# Altium PCB Transformer_25_3_caseAB.PcbDoc
Units mm, origin at the board's own origin, x right, y up, seen from the top; angles counter-clockwise.
Board outline 118 x 78 mm, 6 copper layers (Top Layer, Layer 2, Layer 3, Layer 4, Layer 5, Bottom Layer), stack 0.816 mm thick; 4 components, 12 nets, 28 pads, 20 vias.
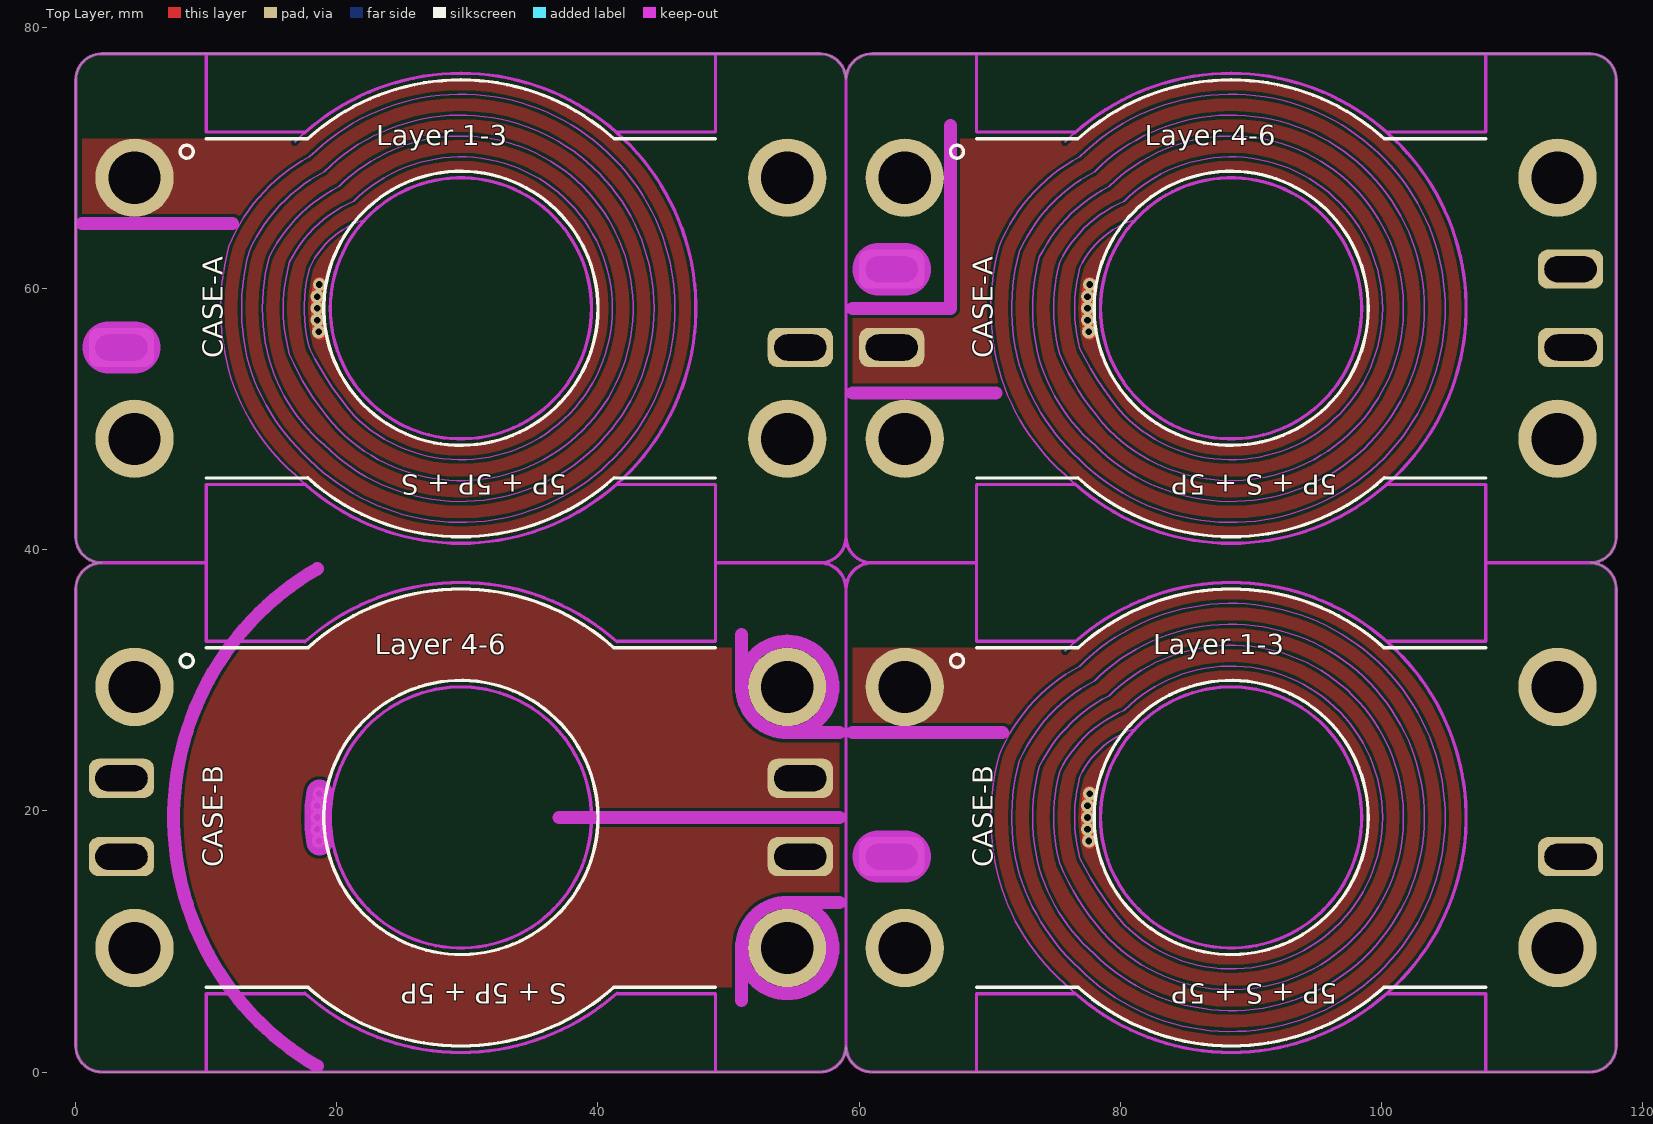
[diagram p0: Top Layer view]
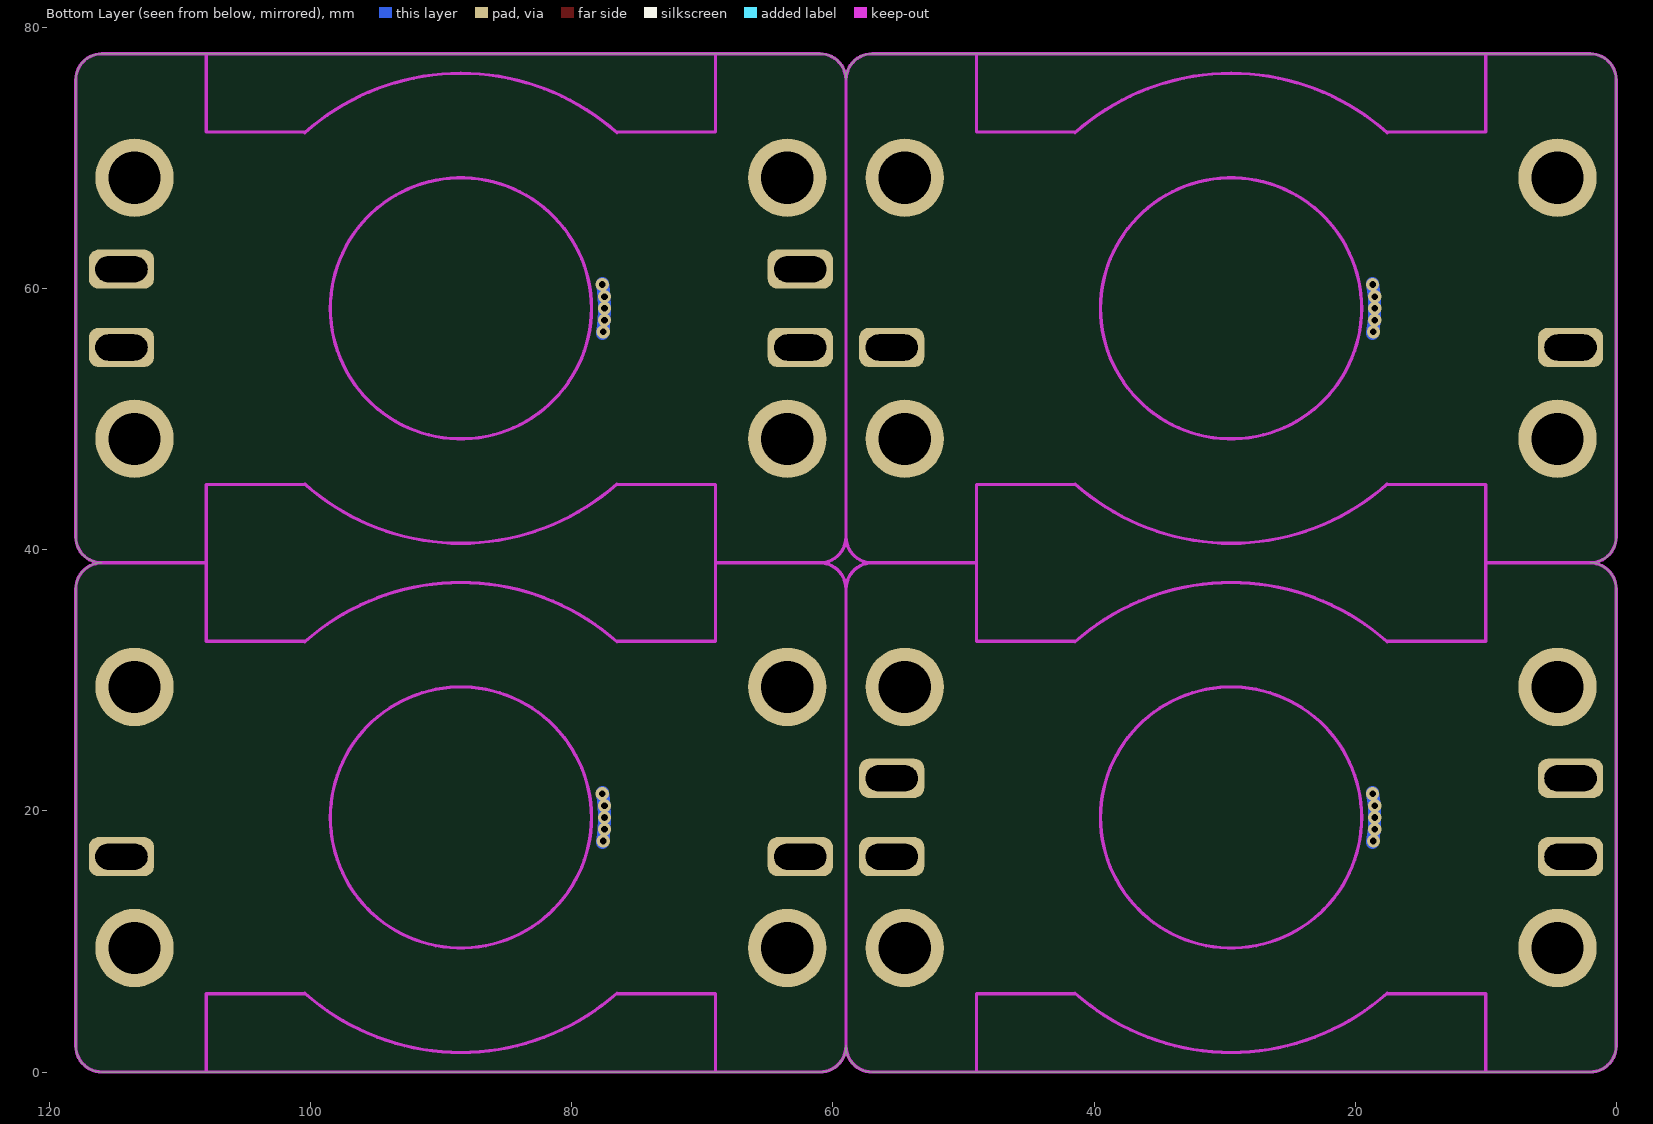
[diagram p1: Bottom Layer view, seen from below]
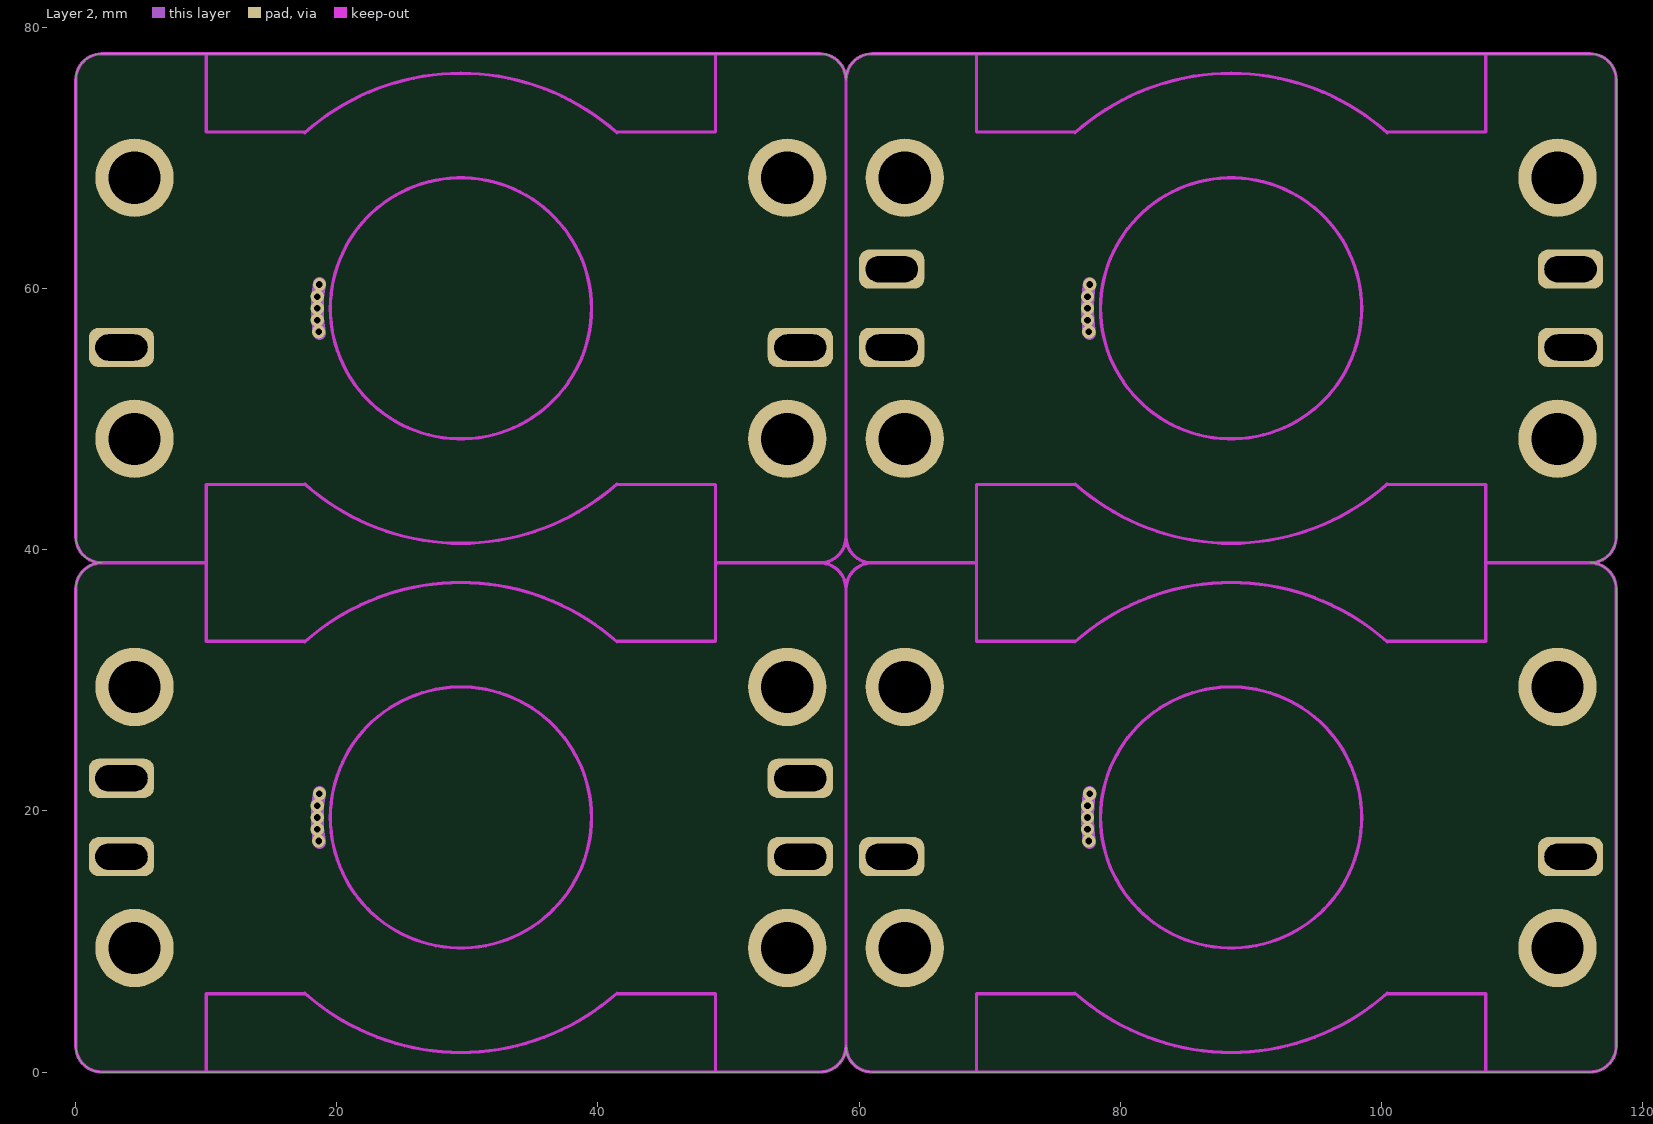
[diagram p2: Layer 2]
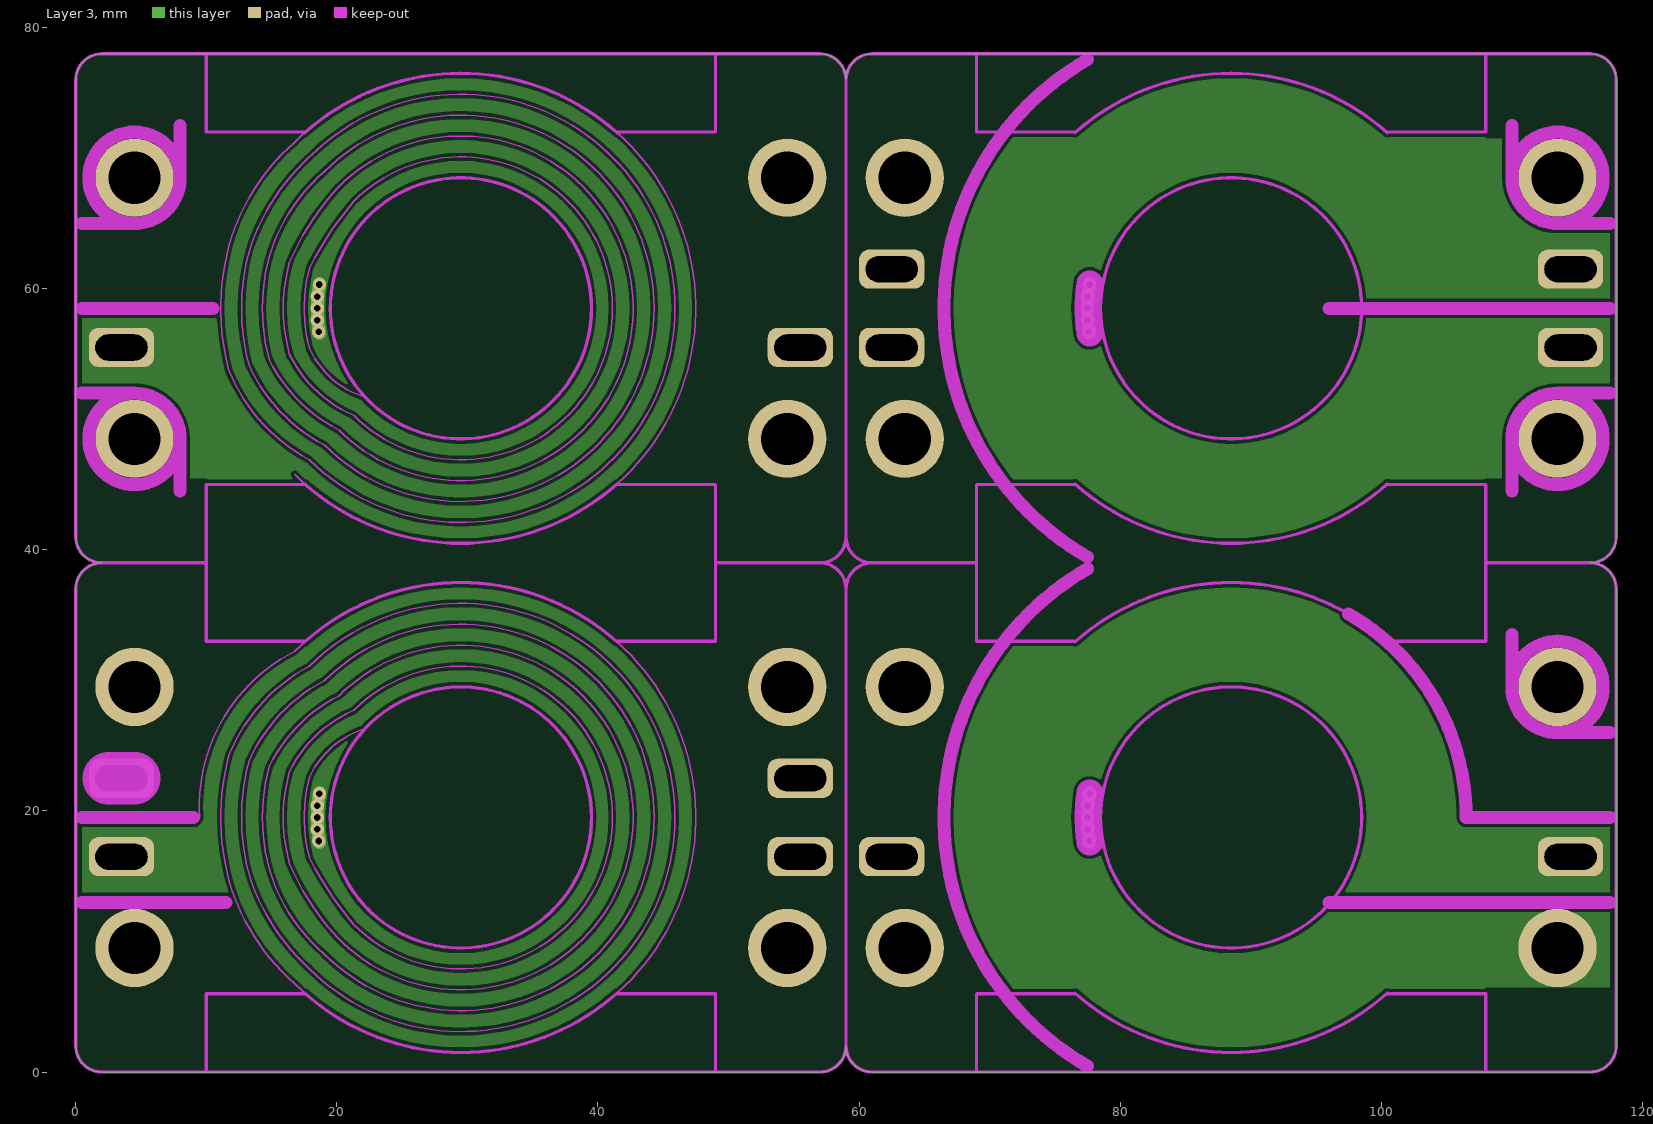
[diagram p3: Layer 3]
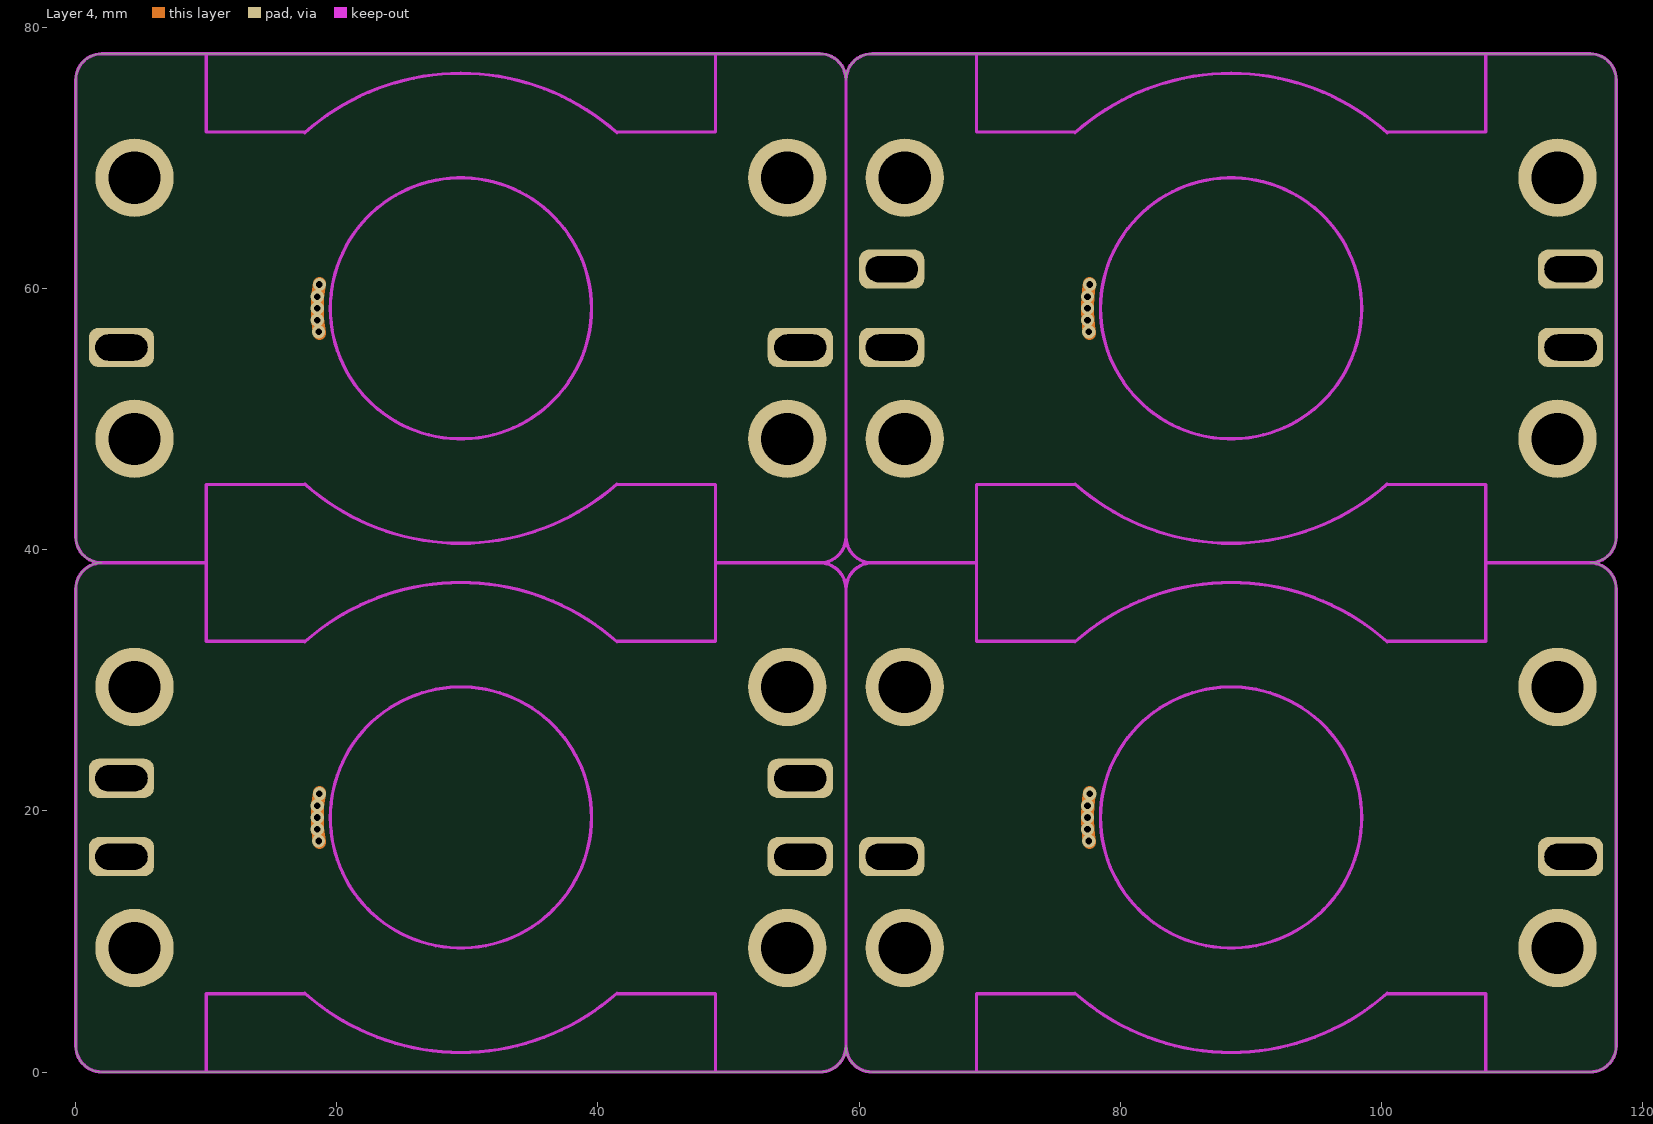
[diagram p4: Layer 4]
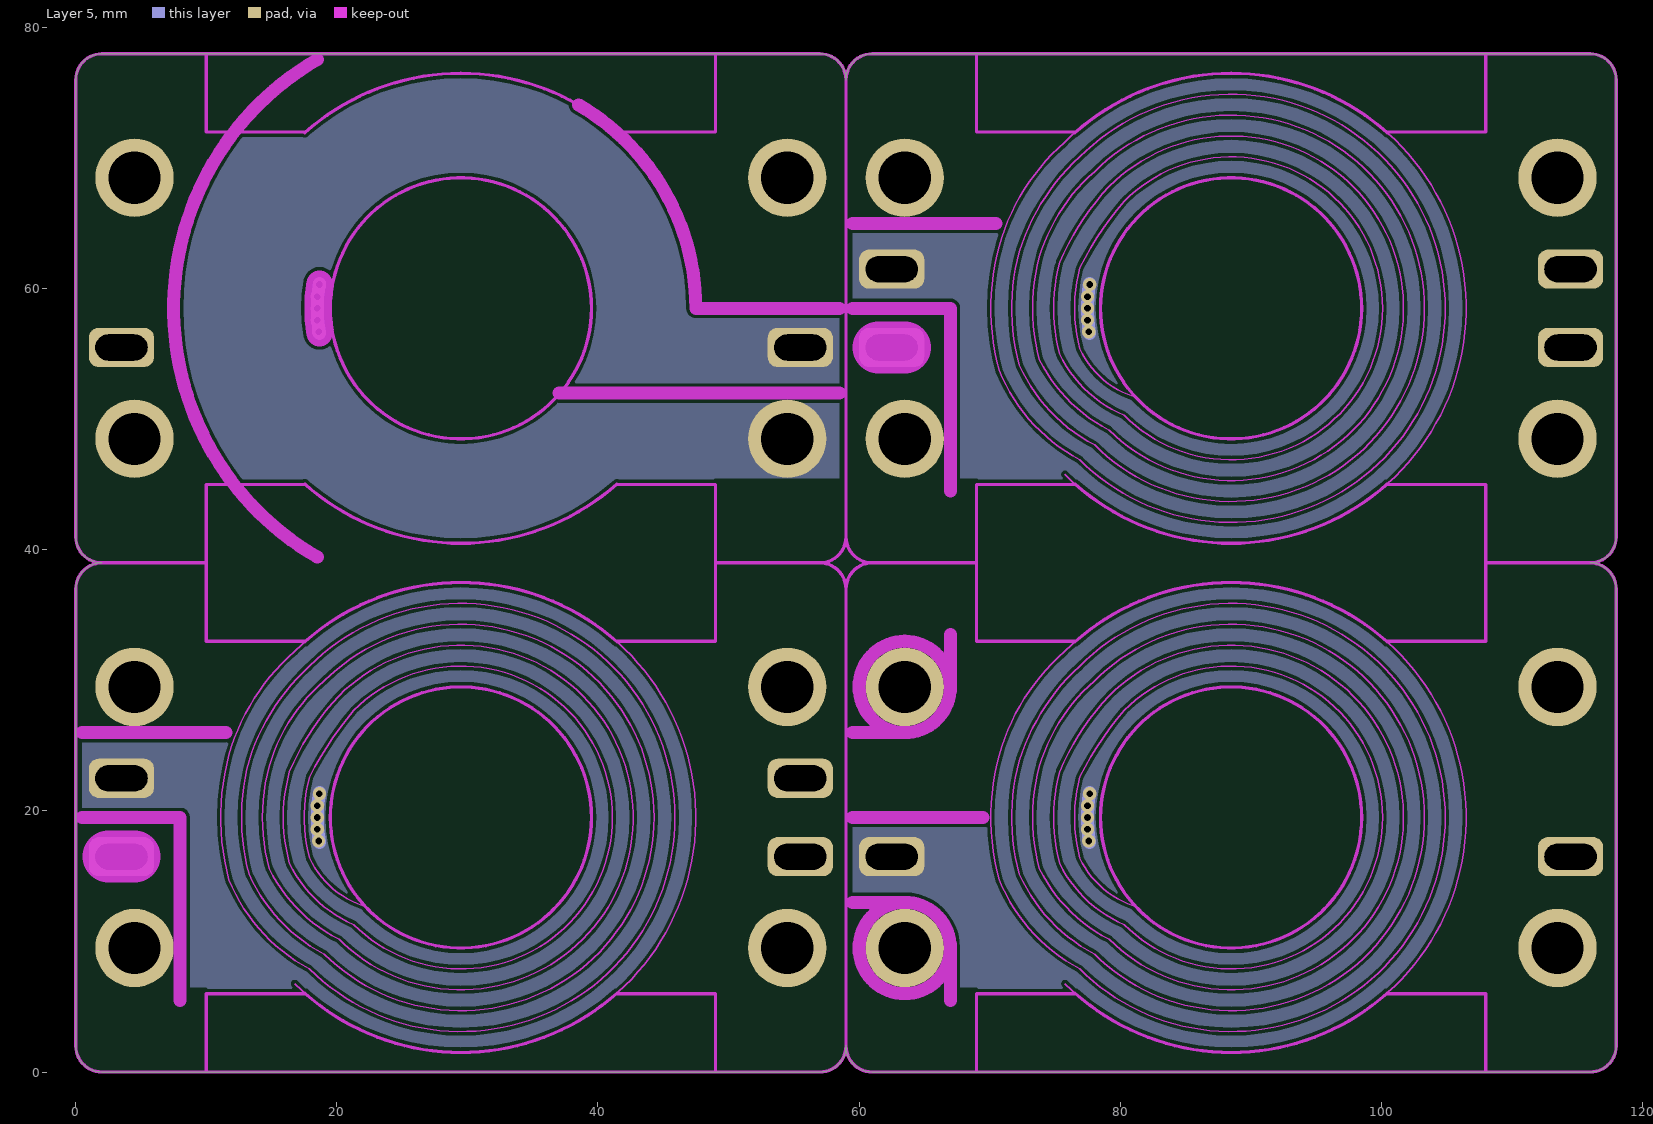
[diagram p5: Layer 5]

## Layer stack, top to bottom
Top Solder: solder mask 0.01, Solder Resist, Dk 3.5
Top Layer: signal copper 0.036
Dielectric 2: prepreg 0.071, PP-006, Dk 4.1
Layer 2: signal copper 0.035
Dielectric 4: prepreg 0.071, PP-006, Dk 4.1
Layer 3: signal copper 0.035
Dielectric 1: dielectric 0.32, FR-4, Dk 4.8
Layer 4: signal copper 0.035
Dielectric 5: prepreg 0.071, PP-006, Dk 4.1
Layer 5: signal copper 0.035
Dielectric 3: prepreg 0.071, PP-006, Dk 4.1
Bottom Layer: signal copper 0.036
Bottom Solder: solder mask 0.01, Solder Resist, Dk 3.5

## Board outline
0,2 0,37 cw(c2,37) 2,39 cw(c2,41) 0,41 0,76 cw(c2,76) 2,78 57,78 cw(c57,76) 59,76 cw(c61,76) 61,78 116,78 cw(c116,76) 118,76 118,41 cw(c116,41) 116,39 cw(c116,37) 118,37 118,2 cw(c116,2) 116,0 61,0 cw(c61,2) 59,2 cw(c57,2) 57,0 2,0 cw(c2,2)

## Design rules (kind name [scope] priority, off if disabled: settings)
Clearance [All] p1: gap=0.254 ignorepadtopadclearanceinfootprint=FALSE except(0: Arc-Hole Track-Hole SMDPad-Hole THPad-Hole Via-Hole Fill-Hole Poly-Hole Region-Hole Text-Hole)
ComponentClearance [All] p1: gap=0 collisioncheckmode=3 verticalgap=0 showdistances=FALSE
PlaneConnect [All] p1: planeconnectstyle=Direct reliefexpansion=0.508 reliefentries=4 reliefconductorwidth=0.254 reliefairgap=0.254
PolygonConnect [All] p1: connectstyle=Direct reliefconductorwidth=0.254 reliefentries=4 polygonreliefangle="90 Angle" airgapwidth=0.254
RoutingVias [All] p1: holewidth=0.711 width=1.27 viastyle="Through Hole" minholewidth=0.711 minwidth=1.27 maxholewidth=0.711 maxwidth=1.27
SolderMaskExpansion [All] p1: expansion=0.102 istentingtop=FALSE
Width [All] p1: maxlimit=1 minlimit=0.254 preferedwidth=0.254
28 further rules are at their usual default settings.

## Components (designator, comment, footprint, x,y, rotation, side; value= is the part's Value field where it differs from the comment)
"Layer 1-3" "Comment" "EQ40/20 CORE" 29.5,58.5 r270 top
"Layer 1-3" "Comment" "EQ40/20 CORE" 88.5,19.5 r270 top
"Layer 4-6" "Comment" "EQ40/20 CORE" 88.5,58.5 r270 top
"Layer 4-6" "Comment" "EQ40/20 CORE" 29.5,19.5 r270 top

## Footprints (in the part's own frame and the unit in brackets; to place one, negate y for a bottom-side part, rotate by r counter-clockwise, add the part's x,y. Pads: shape width x height; smd on the part's side, far side on the other; paste and mask are expansions set on the pad)
"EQ40/20 CORE" [mm]
  round 6 hole 4: 1(-10,-25) 3(10,-25) 6(10,25) 8(-10,25)
  Keep-Out Layer circle w0.254: c0,0 r10
  Keep-Out Layer lines w0.254: 19.5,-19.5 13.5,-19.5 13.5,-12 ; -19.5,-19.5 -13.5,-19.5 -13.5,-12 ; 13.453,-11.959 ccw(c0,0) 13.453,11.959 ; -13.453,-11.959 cw(c0,0) -13.453,11.959 ; 13.5,12 13.5,19.5 19.5,19.5 ; -13.5,12 -13.5,19.5 -19.5,19.5
  silkscreen extent -17.5,-21.5 17.5,19.5

## Free pads (board coordinates)
  rrect50% 5x3 hole 2 slot 4 at 0 deg: 2(62.5,61.5) 4(3.5,16.5) 4(3.5,55.5) 4(62.5,55.5) 5(55.5,16.5) 5(55.5,55.5) 5(62.5,16.5) 5(114.5,16.5) 5(114.5,55.5) 7(3.5,22.5) 7(55.5,22.5) 7(114.5,61.5)

## Via types
v1: diameter 1.016, hole 0.508, Top Layer to Bottom Layer, 20 vias

## Nets (pads, with @x,y where several pads share a name; then routed paths per layer and width w, separated by ;. In a path a pad name is that pad's centre, name@x,y a point inside that pad or via, vN(x,y) a via of type N, cw(c..) or ccw(c..) an arc to the next point about the centre after c; other vN are vias at no path point)
T1P: "Layer 1-3.1"@4.5,68.5 pad.4@3.5,55.5 | length 23
  Top Layer w1: v1@18.667,56.59 cw(c29.5,58.5) v1@18.667,60.41
  Layer 2 w1: v1@18.667,56.59 cw(c29.5,58.5) v1@18.667,60.41
  Layer 3 w1: v1@18.667,56.59 cw(c29.5,58.5) v1@18.667,60.41
  Layer 4 w1: v1@18.667,56.59 cw(c29.5,58.5) v1@18.667,60.41
  Layer 5 w1: v1@18.667,56.59 cw(c29.5,58.5) v1@18.667,60.41
  Bottom Layer w1: v1@18.667,56.59 cw(c29.5,58.5) v1@18.667,60.41
  other v1: 18.6,56.7 18.5,57.6 18.5,58.5 18.5,59.4 18.663,60.32
T1S: "Layer 1-3.6"@54.5,48.5 pad.5@55.5,55.5
T2P: pad.2 pad.4@62.5,55.5 | length 23
  Top Layer w1: v1@77.667,56.59 cw(c88.5,58.5) v1@77.667,60.41
  Layer 2 w1: v1@77.667,56.59 cw(c88.5,58.5) v1@77.667,60.41
  Layer 3 w1: v1@77.667,56.59 cw(c88.5,58.5) v1@77.667,60.41
  Layer 4 w1: v1@77.667,56.59 cw(c88.5,58.5) v1@77.667,60.41
  Layer 5 w1: v1@77.667,56.59 cw(c88.5,58.5) v1@77.667,60.41
  Bottom Layer w1: v1@77.667,56.59 cw(c88.5,58.5) v1@77.667,60.41
  other v1: 77.6,56.7 77.5,57.6 77.5,58.5 77.5,59.4 77.663,60.32
T2S: pad.5@114.5,55.5 pad.7@114.5,61.5
T3P: pad.4@3.5,16.5 pad.7@3.5,22.5 | length 23
  Top Layer w1: v1@18.667,17.59 cw(c29.5,19.5) v1@18.667,21.41
  Layer 2 w1: v1@18.667,17.59 cw(c29.5,19.5) v1@18.667,21.41
  Layer 3 w1: v1@18.667,17.59 cw(c29.5,19.5) v1@18.667,21.41
  Layer 4 w1: v1@18.667,17.59 cw(c29.5,19.5) v1@18.667,21.41
  Layer 5 w1: v1@18.667,17.59 cw(c29.5,19.5) v1@18.667,21.41
  Bottom Layer w1: v1@18.667,17.59 cw(c29.5,19.5) v1@18.667,21.41
  other v1: 18.6,17.7 18.5,18.6 18.5,19.5 18.5,20.4 18.663,21.32
T3S: pad.5@55.5,16.5 pad.7@55.5,22.5
T4P: "Layer 1-3.1"@63.5,29.5 pad.5@62.5,16.5 | length 23
  Top Layer w1: v1@77.667,17.59 cw(c88.5,19.5) v1@77.667,21.41
  Layer 2 w1: v1@77.667,17.59 cw(c88.5,19.5) v1@77.667,21.41
  Layer 3 w1: v1@77.667,17.59 cw(c88.5,19.5) v1@77.667,21.41
  Layer 4 w1: v1@77.667,17.59 cw(c88.5,19.5) v1@77.667,21.41
  Layer 5 w1: v1@77.667,17.59 cw(c88.5,19.5) v1@77.667,21.41
  Bottom Layer w1: v1@77.667,17.59 cw(c88.5,19.5) v1@77.667,21.41
  other v1: 77.6,17.7 77.5,18.6 77.5,19.5 77.5,20.4 77.663,21.32
T4S: "Layer 1-3.6"@113.5,9.5 pad.5@114.5,16.5
T5P: 
T5S: 
T6P: 
T6S: 
pads on no net: "Layer 1-3.3" "Layer 1-3.8" "Layer 4-6.1" "Layer 4-6.3" "Layer 4-6.6" "Layer 4-6.8"

## Polygon pours and split planes (outlines as drawn)
T3S on Top Layer "T3S_L01_P028" (solid, remove dead copper, pour order 28): 8,32.5 10,32.5 10,38 49,38 49,32.5 58.5,32.5 58.5,6.5 49,6.5 49,1 10,1 10,6.5 8,6.5
T4P on Top Layer "T4P_L01_P024" (solid, remove dead copper, pour order 24): 110,32.5 108,32.5 108,38 69,38 69,32.5 59.5,32.5 59.5,6.5 69,6.5 69,1 108,1 108,6.5 110,6.5
T2P on Top Layer "T2P_L01_P013" (solid, remove dead copper, pour order 13): 110,71.5 108,71.5 108,77 69,77 69,71.5 59.5,71.5 59.5,45.5 69,45.5 69,40 108,40 108,45.5 110,45.5
T1P on Top Layer "T1P_L01_P011" (solid, remove dead copper, pour order 11): 51,71.5 49,71.5 49,77 10,77 10,71.5 0.5,71.5 0.5,45.5 10,45.5 10,40 49,40 49,45.5 51,45.5
T3P on Layer 3 "T3P_L03_P029" (solid, remove dead copper, pour order 29): 51,32.5 49,32.5 49,38 10,38 10,32.5 0.5,32.5 0.5,6.5 10,6.5 10,1 49,1 49,6.5 51,6.5
T1P on Layer 3 "T1P_L03_P012" (solid, remove dead copper, pour order 12): 51,71.5 49,71.5 49,77 10,77 10,71.5 0.5,71.5 0.5,45.5 10,45.5 10,40 49,40 49,45.5 51,45.5
T2S on Layer 3 "T2S_L03_P014" (solid, remove dead copper, pour order 14): 67,71.5 69,71.5 69,77 108,77 108,71.5 117.5,71.5 117.5,45.5 108,45.5 108,40 69,40 69,45.5 67,45.5
T4S on Layer 3 "T4S_L03_P001" (solid, remove dead copper, pour order 1): 67,32.5 69,32.5 69,38 108,38 108,32.5 117.5,32.5 117.5,6.5 108,6.5 108,1 69,1 69,6.5 67,6.5
T3P on Layer 5 "T3P_L05_P030" (solid, remove dead copper, pour order 30): 51,32.5 49,32.5 49,38 10,38 10,32.5 0.5,32.5 0.5,6.5 10,6.5 10,1 49,1 49,6.5 51,6.5
T4P on Layer 5 "T4P_L05_P003" (solid, remove dead copper, pour order 3): 110,32.5 108,32.5 108,38 69,38 69,32.5 59.5,32.5 59.5,6.5 69,6.5 69,1 108,1 108,6.5 110,6.5
T1S on Layer 5 "T1S_L05_P017" (solid, remove dead copper, pour order 17): 8,71.5 10,71.5 10,77 49,77 49,71.5 58.5,71.5 58.5,45.5 49,45.5 49,40 10,40 10,45.5 8,45.5
T2P on Layer 5 "T2P_L05_P015" (solid, remove dead copper, pour order 15): 110,71.5 108,71.5 108,77 69,77 69,71.5 59.5,71.5 59.5,45.5 69,45.5 69,40 108,40 108,45.5 110,45.5

## Keep-outs
Top Layer:
  circle w1: c54.5,29.5 r3.5
  circle w1: c54.5,9.5 r3.5
  lines w0.1: 16.772,71.228 cw(c29.5,58.5) 16.772,45.772 cw(c27.506,58.151) 11.727,53.738 cw(c29.5,58.5) 11.727,63.262 cw(c24.33,58.08) 17.903,70.097 cw(c29.5,58.5) 17.903,46.903 cw(c28.997,59.095) 13.272,54.152 cw(c29.5,58.5) 13.272,62.848 cw(c25.057,57.519) 19.035,68.965 cw(c29.5,58.5) 19.035,48.035 cw(c28.008,58.455) 14.818,54.566 cw(c29.5,58.5) 14.818,62.434 cw(c25.72,56.984) 20.166,67.834 cw(c29.5,58.5) 20.166,49.166 cw(c34.816,62.899) 16.363,54.98 cw(c29.5,58.5) 16.363,62.02 cw(c25.179,57.672) 21.298,66.702 cw(c29.5,58.5) 21.298,50.298 cw(c41.084,67.128) 17.909,55.394 cw(c29.5,58.5) 17.909,61.606 cw(c24.168,58.698) 22,65.25 ; 75.772,32.228 cw(c88.5,19.5) 75.772,6.772 cw(c86.506,19.151) 70.727,14.738 cw(c88.5,19.5) 70.727,24.262 cw(c83.33,19.08) 76.903,31.097 cw(c88.5,19.5) 76.903,7.903 cw(c87.997,20.095) 72.272,15.152 cw(c88.5,19.5) 72.272,23.848 cw(c84.057,18.519) 78.035,29.965 cw(c88.5,19.5) 78.035,9.035 cw(c87.008,19.455) 73.818,15.566 cw(c88.5,19.5) 73.818,23.434 cw(c84.72,17.984) 79.166,28.834 cw(c88.5,19.5) 79.166,10.166 cw(c93.816,23.899) 75.363,15.98 cw(c88.5,19.5) 75.363,23.02 cw(c84.179,18.672) 80.298,27.702 cw(c88.5,19.5) 80.298,11.298 cw(c100.084,28.128) 76.909,16.394 cw(c88.5,19.5) 76.909,22.606 cw(c83.168,19.698) 81,26.25 ; 75.772,71.228 cw(c88.5,58.5) 75.772,45.772 cw(c86.506,58.151) 70.727,53.738 cw(c88.5,58.5) 70.727,63.262 cw(c83.33,58.08) 76.903,70.097 cw(c88.5,58.5) 76.903,46.903 cw(c87.997,59.095) 72.272,54.152 cw(c88.5,58.5) 72.272,62.848 cw(c84.057,57.519) 78.035,68.965 cw(c88.5,58.5) 78.035,48.035 cw(c87.008,58.455) 73.818,54.566 cw(c88.5,58.5) 73.818,62.434 cw(c84.72,56.984) 79.166,67.834 cw(c88.5,58.5) 79.166,49.166 cw(c93.816,62.899) 75.363,54.98 cw(c88.5,58.5) 75.363,62.02 cw(c84.179,57.672) 80.298,66.702 cw(c88.5,58.5) 80.298,50.298 cw(c100.084,67.128) 76.909,55.394 cw(c88.5,58.5) 76.909,61.606 cw(c83.168,58.698) 81,65.25
  lines w0.25: 38.5,42.912 ccw(c29.5,58.5) 38.5,74.088 ; 97.5,3.912 ccw(c88.5,19.5) 97.5,35.088 ; 97.5,42.912 ccw(c88.5,58.5) 97.5,74.088
  lines w1: 0.5,65 12,65 ; 18.5,0.447 cw(c29.5,19.5) 18.5,38.553 ; 37,19.5 58.5,19.5 ; 51,5.5 51,9.5 ; 51,29.5 51,33.5 ; 54.5,13 58.5,13 ; 54.5,26 58.5,26 ; 59.5,26 71,26 ; 59.5,52 70.5,52 ; 59.5,58.5 67,58.5 67,72.5
  lines w2: 18.667,17.59 cw(c29.5,19.5) 18.667,21.41
  lines w4: 2.5,55.5 4.5,55.5 ; 61.5,16.5 63.5,16.5 ; 61.5,61.5 63.5,61.5
Layer 3:
  circle w1: c4.5,68.5 r3.5
  circle w1: c4.5,48.5 r3.5
  circle w1: c113.5,68.5 r3.5
  circle w1: c113.5,48.5 r3.5
  circle w1: c113.5,29.5 r3.5
  lines w0.1: 9.5,19.5 cw(c22.775,20.357) 16.772,32.228 cw(c29.5,19.5) 16.772,6.772 cw(c27.506,19.151) 11.727,14.738 cw(c29.5,19.5) 11.727,24.262 cw(c24.33,19.08) 17.903,31.097 cw(c29.5,19.5) 17.903,7.903 cw(c28.997,20.095) 13.272,15.152 cw(c29.5,19.5) 13.272,23.848 cw(c25.057,18.519) 19.035,29.965 cw(c29.5,19.5) 19.035,9.035 cw(c28.008,19.455) 14.818,15.566 cw(c29.5,19.5) 14.818,23.434 cw(c25.72,17.984) 20.166,28.834 cw(c29.5,19.5) 20.166,10.166 cw(c34.816,23.899) 16.363,15.98 cw(c29.5,19.5) 16.363,23.02 cw(c25.179,18.672) 21.298,27.702 cw(c29.5,19.5) 21.298,11.298 cw(c41.084,28.128) 17.909,16.394 cw(c29.5,19.5) 17.909,22.606 cw(c24.168,19.698) 22,26.25 ; 16.772,45.772 ccw(c29.5,58.5) 16.772,71.228 ccw(c27.506,58.849) 11.727,63.262 ccw(c29.5,58.5) 11.727,53.738 ccw(c24.33,58.92) 17.903,46.903 ccw(c29.5,58.5) 17.903,70.097 ccw(c28.997,57.905) 13.272,62.848 ccw(c29.5,58.5) 13.272,54.152 ccw(c25.057,59.481) 19.035,48.035 ccw(c29.5,58.5) 19.035,68.965 ccw(c28.008,58.545) 14.818,62.434 ccw(c29.5,58.5) 14.818,54.566 ccw(c25.72,60.016) 20.166,49.166 ccw(c29.5,58.5) 20.166,67.834 ccw(c34.816,54.101) 16.363,62.02 ccw(c29.5,58.5) 16.363,54.98 ccw(c25.179,59.328) 21.298,50.298 ccw(c29.5,58.5) 21.298,66.702 ccw(c41.084,49.872) 17.909,61.606 ccw(c29.5,58.5) 17.909,55.394 ccw(c24.168,58.302) 22,51.75
  lines w1: 0.5,13 11.5,13 ; 0.5,19.5 9,19.5 ; 0.5,52 4.5,52 ; 0.5,58.5 10.5,58.5 ; 0.5,65 4.5,65 ; 8,44.5 8,48.5 ; 8,68.5 8,72.5 ; 77.5,0.447 cw(c88.5,19.5) 77.5,38.553 ; 77.5,39.447 cw(c88.5,58.5) 77.5,77.553 ; 96,13 117.5,13 ; 96,58.5 117.5,58.5 ; 97.5,35.088 cw(c88.5,19.5) 106.5,19.5 ; 106.499,19.5 117.5,19.5 ; 110,29.5 110,33.5 ; 110,44.5 110,48.5 ; 110,68.5 110,72.5 ; 113.5,26 117.5,26 ; 113.5,52 117.5,52 ; 113.5,65 117.5,65
  lines w2: 77.667,17.59 cw(c88.5,19.5) 77.667,21.41 ; 77.667,56.59 cw(c88.5,58.5) 77.667,60.41
  lines w4: 2.5,22.5 4.5,22.5
Layer 5:
  circle w1: c63.5,9.5 r3.5
  circle w1: c63.5,29.5 r3.5
  lines w0.1: 16.772,6.772 ccw(c29.5,19.5) 16.772,32.228 ccw(c27.506,19.849) 11.727,24.262 ccw(c29.5,19.5) 11.727,14.738 ccw(c24.33,19.92) 17.903,7.903 ccw(c29.5,19.5) 17.903,31.097 ccw(c28.997,18.905) 13.272,23.848 ccw(c29.5,19.5) 13.272,15.152 ccw(c25.057,20.481) 19.035,9.035 ccw(c29.5,19.5) 19.035,29.965 ccw(c28.008,19.545) 14.818,23.434 ccw(c29.5,19.5) 14.818,15.566 ccw(c25.72,21.016) 20.166,10.166 ccw(c29.5,19.5) 20.166,28.834 ccw(c34.816,15.101) 16.363,23.02 ccw(c29.5,19.5) 16.363,15.98 ccw(c25.179,20.328) 21.298,11.298 ccw(c29.5,19.5) 21.298,27.702 ccw(c41.084,10.872) 17.909,22.606 ccw(c29.5,19.5) 17.909,16.394 ccw(c24.168,19.302) 22,12.75 ; 75.772,6.772 ccw(c88.5,19.5) 75.772,32.228 ccw(c86.506,19.849) 70.727,24.262 ccw(c88.5,19.5) 70.727,14.738 ccw(c83.33,19.92) 76.903,7.903 ccw(c88.5,19.5) 76.903,31.097 ccw(c87.997,18.905) 72.272,23.848 ccw(c88.5,19.5) 72.272,15.152 ccw(c84.057,20.481) 78.035,9.035 ccw(c88.5,19.5) 78.035,29.965 ccw(c87.008,19.545) 73.818,23.434 ccw(c88.5,19.5) 73.818,15.566 ccw(c84.72,21.016) 79.166,10.166 ccw(c88.5,19.5) 79.166,28.834 ccw(c93.816,15.101) 75.363,23.02 ccw(c88.5,19.5) 75.363,15.98 ccw(c84.179,20.328) 80.298,11.298 ccw(c88.5,19.5) 80.298,27.702 ccw(c100.084,10.872) 76.909,22.606 ccw(c88.5,19.5) 76.909,16.394 ccw(c83.168,19.302) 81,12.75 ; 75.772,45.772 ccw(c88.5,58.5) 75.772,71.228 ccw(c86.506,58.849) 70.727,63.262 ccw(c88.5,58.5) 70.727,53.738 ccw(c83.33,58.92) 76.903,46.903 ccw(c88.5,58.5) 76.903,70.097 ccw(c87.997,57.905) 72.272,62.848 ccw(c88.5,58.5) 72.272,54.152 ccw(c84.057,59.481) 78.035,48.035 ccw(c88.5,58.5) 78.035,68.965 ccw(c87.008,58.545) 73.818,62.434 ccw(c88.5,58.5) 73.818,54.566 ccw(c84.72,60.016) 79.166,49.166 ccw(c88.5,58.5) 79.166,67.834 ccw(c93.816,54.101) 75.363,62.02 ccw(c88.5,58.5) 75.363,54.98 ccw(c84.179,59.328) 80.298,50.298 ccw(c88.5,58.5) 80.298,66.702 ccw(c100.084,49.872) 76.909,61.606 ccw(c88.5,58.5) 76.909,55.394 ccw(c83.168,58.302) 81,51.75
  lines w1: 0.5,19.5 8,19.5 8,5.5 ; 0.5,26 11.5,26 ; 18.5,39.447 cw(c29.5,58.5) 18.5,77.553 ; 37,52 58.5,52 ; 38.5,74.088 cw(c29.5,58.5) 47.5,58.5 ; 47.499,58.5 58.5,58.5 ; 59.5,13 63.5,13 ; 59.5,19.5 69.5,19.5 ; 59.5,26 63.5,26 ; 59.5,58.5 67,58.5 67,44.5 ; 59.5,65 70.5,65 ; 67,5.5 67,9.5 ; 67,29.5 67,33.5
  lines w2: 18.667,56.59 cw(c29.5,58.5) 18.667,60.41
  lines w4: 2.5,16.5 4.5,16.5 ; 61.5,55.5 63.5,55.5
Keep-Out Layer:
  lines w0.254: 10,39 2,39 ; 49,39 57,39 ; 69,39 61,39 ; 108,39 116,39 ; 2,39 cw(c2,41) 0,41 0,76 cw(c2,76) 2,78 57,78 cw(c57,76) 59,76 ; 2,39 ccw(c2,37) 0,37 0,2 ccw(c2,2) 2,0 57,0 ccw(c57,2) 59,2 ; 57,39 ccw(c57,41) 59,41 ; 57,39 cw(c57,37) 59,37 ; 59,2 ccw(c61,2) 61,0 116,0 ccw(c116,2) 118,2 118,37 ccw(c116,37) 116,39 ; 59,2 59,37 ; 59,37 cw(c61,37) 61,39 ; 59,41 ccw(c61,41) 61,39 ; 59,41 59,76 ; 59,76 cw(c61,76) 61,78 116,78 cw(c116,76) 118,76 118,41 cw(c116,41) 116,39

## Silkscreen, mask and mechanical layers (free items; w line width, h text height)
Top Overlay:
  text "CASE-A" at 11.246,54.683 h1.52 r90
  text "CASE-A" at 70.246,54.683 h1.52 r90
  text "5P + 5P + S" at 37.625,45.746 h1.52 r180
  text "5P + S + 5P" at 96.625,45.746 h1.52 r180
  text "CASE-B" at 11.246,15.683 h1.52 r90
  text "CASE-B" at 70.246,15.683 h1.52 r90
  text "S + 5P + 5P" at 37.625,6.746 h1.52 r180
  text "5P + S + 5P" at 96.625,6.746 h1.52 r180